# EAGLE board LAYOUT_BOARD (EAGLE 9.1.3)

Size 76.28 x 157.61 mm. Coordinates in mm from the lower left corner, seen from the top.
Outline: 0,0 76.19,0 76.28,157.61 0.09,157.61 0,0
Copper layers (1*16): Top 0.035mm / dielectric 1.5mm / Bottom 0.035mm
Design rules "default": minimum track width 6mil, minimum drill 0.35mm, track to track 6mil, track to pad 6mil, pad to pad 6mil, via to via 6mil, smd to smd 6mil, copper to edge 40mil, drill to drill 6mil, minimum pad ring 10mil, minimum via ring 8mil, stop-mask expansion 4mil, vias tented up to drill 0mil, thermal gap 10mil
Net classes: 0 default: width 0.2 mm, clearance 0.205 mm

## Footprints (pad centres in the part's own frame; a part is rotated, then mirrored left to right if it is on the bottom)
STAND-OFF = hole 3.302: 0,0

## Placement (x,y rotation side)
STANDOFF5  STAND-OFF  [STAND-OFF]  72.48,3.53 0 top
STANDOFF6  STAND-OFF  [STAND-OFF]  3.57,3.36 0 top
STANDOFF7  STAND-OFF  [STAND-OFF]  72.48,153.82 0 top
STANDOFF8  STAND-OFF  [STAND-OFF]  3.9,153.82 0 top

## Library data of the parts
STANDOFF5-STANDOFF8 = SparkFun-Electromechanical